# EAGLE board CAN-BUS-UART_v1 (EAGLE 6.3)
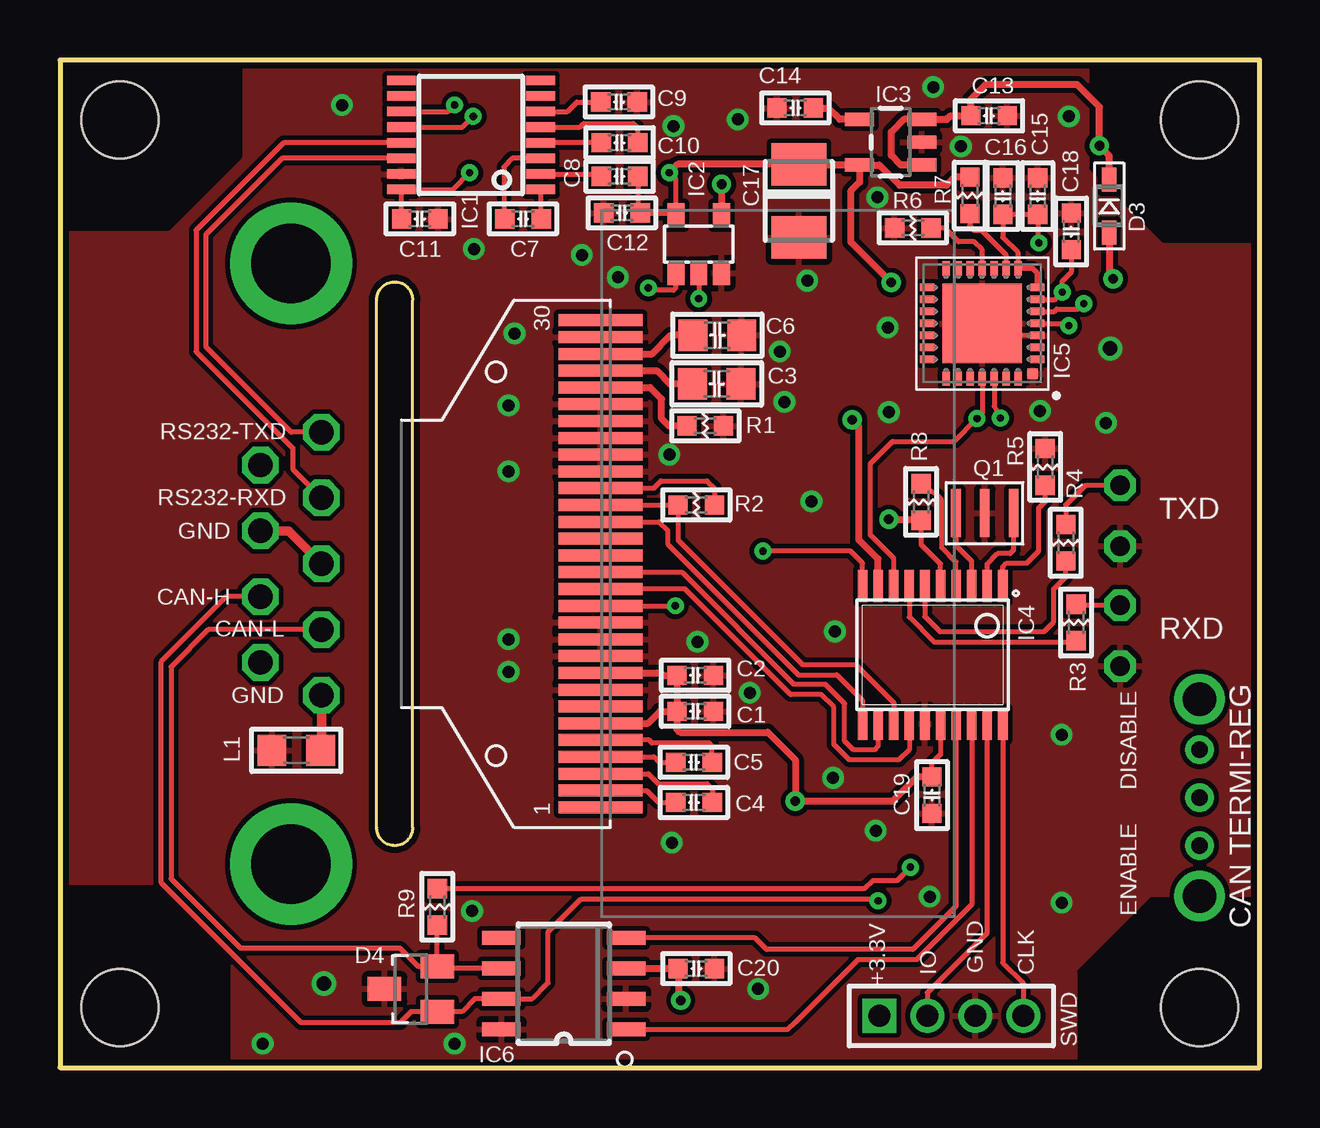
[diagram p0: board, top side]
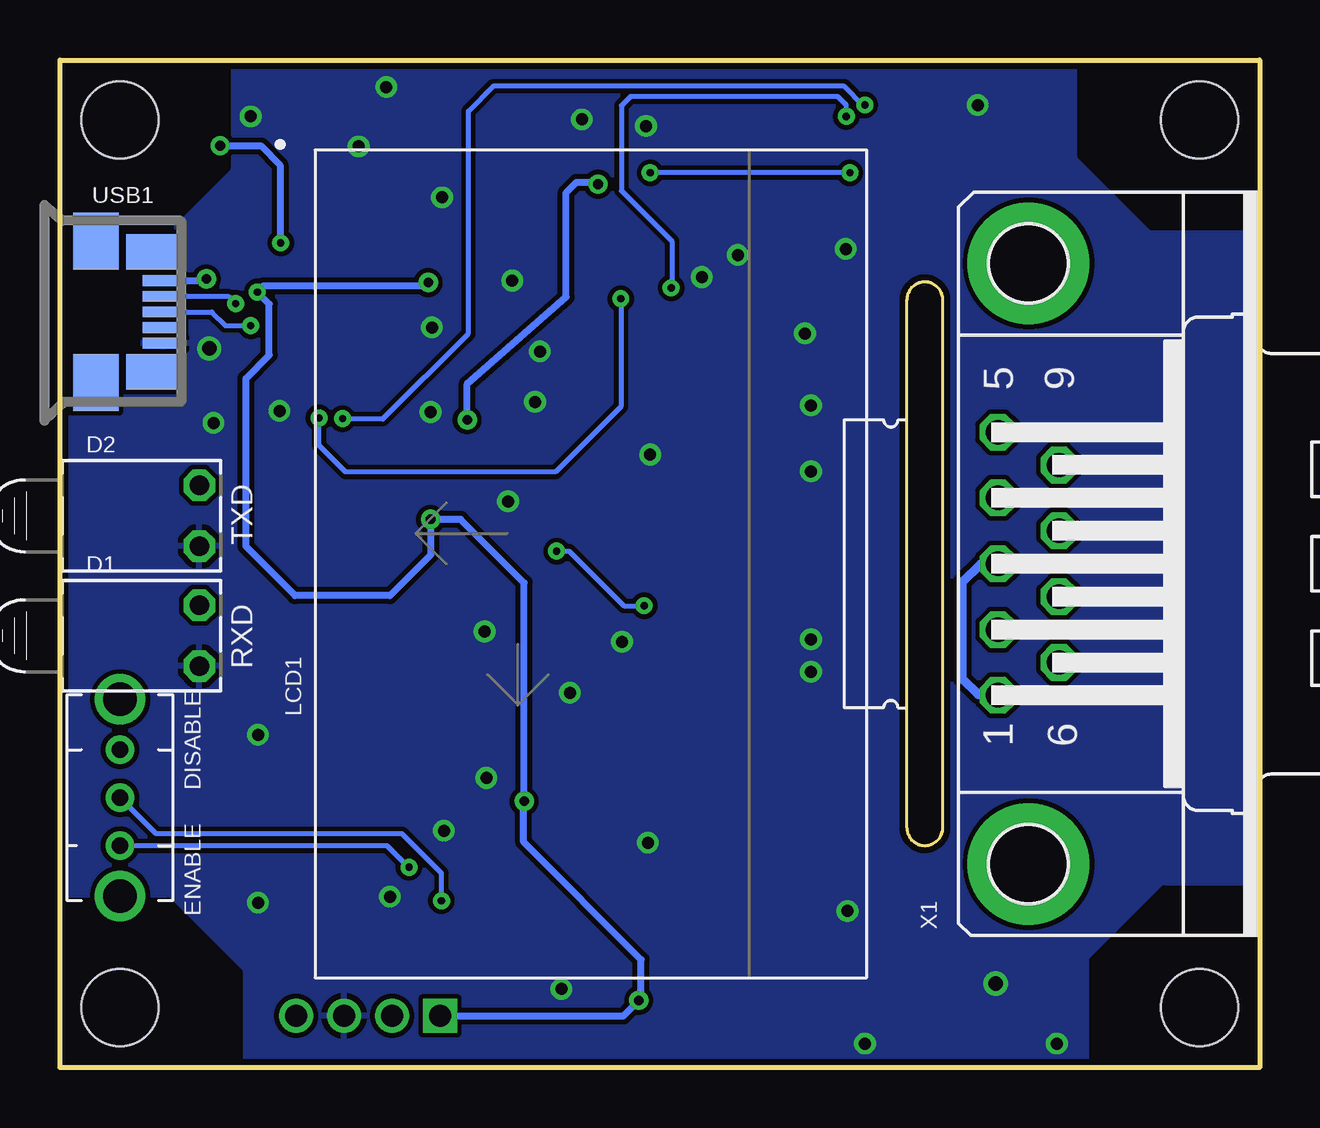
[diagram p1: board, bottom side, seen from below]

Size 50 x 42 mm. Coordinates in mm from the lower left corner, seen from the top.
Outline: 50,0 50,42 0,42 0,0 50,0
Copper layers (1+16): Top 0.035mm / dielectric 1.5mm / Bottom 0.035mm
Design rules "default": minimum track width 0.2mm, minimum drill 0.3mm, track to track 0.2mm, track to pad 0.2mm, pad to pad 0.2mm, via to via 0.2mm, smd to smd 0.2mm, copper to edge 10mil, drill to drill 0.2mm, minimum pad ring 10mil, minimum via ring 8mil, stop-mask expansion 4mil, vias tented up to drill 0mil, thermal gap 10mil
Net classes: 0 default: clearance 0.2 mm; 2 GND: width 0.2 mm, clearance 0.152 mm
Holes 3.2 mm at 47.5,39.5 2.5,2.5 47.5,2.5 2.5,39.5

## Footprints (pad centres in the part's own frame; a part is rotated, then mirrored left to right if it is on the bottom)
C0603 = smd 0.8 x 0.8: 1 -0.762,0; 2 0.762,0
C0805 = smd 1.2 x 1.3: 1 -1.016,0; 2 1.016,0
C3528-21/T = smd 1.778 x 2.286: + 1.524,0; - -1.524,0
3FG2HD-T1 = drill 0.8 octagon: A -0.889,1.27; K -0.889,-1.27
SOD323 = smd 1 x 0.6: A 1.1,0; C -1.1,0
SOT23 = smd 1 x 1.4: D 0,-1.1; G 0.95,1.1; S -0.95,1.1
PW_R-PDSO-G16 = smd 0.4 x 1.2: 1 -2.275,-2.9; 2 -1.625,-2.9; 3 -0.975,-2.9; 4 -0.325,-2.9; 5 0.325,-2.9; 6 0.975,-2.9; 7 1.625,-2.9; 8 2.275,-2.9; 9 2.275,2.9; 10 1.625,2.9; 11 0.975,2.9; 12 0.325,2.9; 13 -0.325,2.9; 14 -0.975,2.9; 15 -1.625,2.9; 16 -2.275,2.9
SOT23-5L_MC74HC1G08 = smd 0.7 x 1: 1 -0.95,-1.2; 2 0,-1.2; 3 0.95,-1.2; 4 0.95,1.2; 5 -0.95,1.2
SOT23-5 = smd 0.55 x 1.2: 1 -0.95,-1.3; 2 0,-1.3; 3 0.95,-1.3; 4 0.95,1.3; 5 -0.95,1.3
TSSOP20 = smd 0.4 x 1.35: 1 -2.925,-2.875; 2 -2.275,-2.875; 3 -1.625,-2.875; 4 -0.975,-2.875; 5 -0.325,-2.875; 6 0.325,-2.875; 7 0.975,-2.875; 8 1.625,-2.875; 9 2.275,-2.875; 10 2.925,-2.875; 11 2.925,2.875; 12 2.275,2.875; 13 1.625,2.875; 14 0.975,2.875; 15 0.325,2.875; 16 -0.325,2.875; 17 -0.975,2.875; 18 -1.625,2.875; 19 -2.275,2.875; 20 -2.925,2.875
MLP28 = smd 0.6 x 0.3: 1 -2.3,1.5; 2 -2.3,1; 3 -2.3,0.5; 4 -2.3,0; 5 -2.3,-0.5; 6 -2.3,-1; 7 -2.3,-1.5; 15 2.3,-1.5; 16 2.3,-1; 17 2.3,-0.5; 18 2.3,0; 19 2.3,0.5; 20 2.3,1; 21 2.3,1.5 | smd 0.3 x 0.6: 8 -1.5,-2.3; 9 -1,-2.3; 10 -0.5,-2.3; 11 0,-2.3; 12 0.5,-2.3; 13 1,-2.3; 14 1.5,-2.3; 22 1.5,2.3; 23 1,2.3; 24 0.5,2.3; 25 0,2.3; 26 -0.5,2.3; 27 -1,2.3; 28 -1.5,2.3 | smd 3.3 x 3.3: EXP 0,0 | smd 0.435 x 0.435: M -2.103,2.103
SO8 = smd 0.6 x 1.6: 1 -1.905,-2.6; 2 -0.635,-2.6; 3 0.635,-2.6; 4 1.905,-2.6; 5 1.905,2.6; 6 0.635,2.6; 7 -0.635,2.6; 8 -1.905,2.6
1X04M = drill 0.914 square: 1 -3,0 | drill 0.914: 2 -1,0; 3 1,0; 4 3,0
L0805 = smd 1.2 x 1.3: 1 -1.016,0; 2 1.016,0
SH1106_1.3OLED_BUTTOM = smd 0.5 x 3.5: 1 10.15,-5.97; 2 9.45,-5.97; 3 8.75,-5.97; 4 8.05,-5.97; 5 7.35,-5.97; 6 6.65,-5.97; 7 5.95,-5.97; 8 5.25,-5.97; 9 4.55,-5.97; 10 3.85,-5.97; 11 3.15,-5.97; 12 2.45,-5.97; 13 1.75,-5.97; 14 1.05,-5.97; 15 0.35,-5.97; 16 -0.35,-5.97; 17 -1.05,-5.97; 18 -1.75,-5.97; 19 -2.45,-5.97; 20 -3.15,-5.97; 21 -3.85,-5.97; 22 -4.55,-5.97; 23 -5.25,-5.97; 24 -5.95,-5.97; 25 -6.65,-5.97; 26 -7.35,-5.97; 27 -8.05,-5.97; 28 -8.75,-5.97; 29 -9.45,-5.97; 30 -10.15,-5.97
CSTLA_X = smd 0.4 x 2: 1 -1.19,-0.02; 2 0.01,-0.02; 3 1.21,-0.02
R0603@1 = smd 0.8 x 0.8: 1 -0.762,0; 2 0.762,0
R0603 = smd 0.8 x 0.8: 1 -0.762,0; 2 0.762,0
SK-12DO2 = drill 0.7: 1 -2,0; 3 2,0; C 0,0 | drill 1.4: P$4 -4.1,0; P$5 4.1,0
MOLEX-47364-0001 = smd 1.7 x 0.45: 1 2.8,1.3; 2 2.8,0.65; 3 2.8,0; 4 2.8,-0.65; 5 2.8,-1.3 | smd 1.9 x 2.375: GND1 0,2.95; GND4 0,-2.95 | smd 2.1 x 1.475: GND2 2.3,2.5; GND3 2.3,-2.5
M09H-1 = drill 1.016 octagon: 1 -5.486,0; 2 -2.743,0; 3 0,0; 4 2.743,0; 5 5.486,0; 6 -4.115,-2.54; 7 -1.372,-2.54; 8 1.372,-2.54; 9 4.115,-2.54 | drill 3.302 pad 5.08: G1 -12.522,-1.27; G2 12.522,-1.27

## Placement (x,y rotation side)
C1  1uF  [C0603]  26.48,14.85 0 top
C2  1uF  [C0603]  26.48,16.35 0 top
C3  6.8uF  [C0805]  27.38,28.5 0 top
C4  1uF  [C0603]  26.43,11.05 180 top
C5  1uF  [C0603]  26.43,12.72 180 top
C6  2.2uF  [C0805]  27.4,30.52 0 top
C7  0.1uF  [C0603]  19.3,35.38 0 top
C8  0.1uF  [C0603]  23.32,37.15 180 top
C9  0.1uF  [C0603]  23.3,40.25 180 top
C10  0.1uF  [C0603]  23.32,38.55 180 top
C11  0.1uF  [C0603]  15,35.38 180 top
C12  0.1uF  [C0603]  23.43,35.62 0 top
C13  1uF/10V  [C0603]  38.73,39.67 180 top
C14  470pF  [C0603]  30.65,40 0 top
C15  0.1uF  [C0603]  40.75,36.33 90 top
C16  1uF  [C0603]  39.3,36.33 90 top
C17  47uF/6V  [C3528-21/T]  30.8,36.12 90 top
C18  1uF  [C0603]  42.15,34.85 270 top
C19  0.1uF  [C0603]  36.34,11.36 90 top
C20  0.1uF  [C0603]  26.52,4.12 180 top
D1  STATUS  [3FG2HD-T1]  43.3,18 0 bottom
D2  STATUS  [3FG2HD-T1]  43.3,23 0 bottom
D3  B5189W  [SOD323]  43.73,35.91 270 top
D4  NPU2105  [SOT23]  14.62,3.27 270 top
IC1  MAX3232CPW  [PW_R-PDSO-G16]  17.12,38.88 90 top
IC2  MC74HC1G08  [SOT23-5L_MC74HC1G08]  26.62,34.33 0 top
IC3  MIC5219-3.3V  [SOT23-5]  34.62,38.58 90 top
IC4  STM32F042X  [TSSOP20]  36.38,17.2 180 top
IC5  CP2102  [MLP28]  38.44,31.02 180 top
IC6  SN65HVD230  [SO8]  21,3.5 90 top
JP1  SWD  [1X04M]  37.16,2.16 0 top
L1  BEAD  [L0805]  9.85,13.22 180 top
LCD1  SH1106 1.3Inch OLED  [SH1106_1.3OLED_BUTTOM]  28.5,21 270 top
Q1  8MHz  [CSTLA_X]  38.55,23.09 180 top
R1  100k  [R0603@1]  26.9,26.75 180 top
R2  0  [R0603@1]  26.52,23.45 0 top
R3  220  [R0603]  42.35,18.55 270 top
R4  220  [R0603]  41.92,21.88 270 top
R5  10k  [R0603@1]  41.06,25.04 90 top
R6  10k  [R0603]  35.55,35 0 top
R7  10k  [R0603]  37.92,36.35 90 top
R8  10k  [R0603@1]  35.9,23.57 270 top
R9  120  [R0603@1]  15.73,6.7 90 top
SW1  SK-12D02  [SK-12DO2]  47.5,11.25 270 bottom
USB1  MOLEX-47346-0001  [MOLEX-47364-0001]  48.5,31.5 0 bottom
X1  CAN-DSUB  [M09H-1]  10.9,21 90 bottom

## Library data of the parts
C1-C16 C18-C20 D1-D4 IC1 IC2 IC6 L1 Q1 R1-R9 SW1 = cona_lib
C17 = rc-master-smd
IC3 = SparkFun
IC4 = stm32
IC5 = silabs; MF: FARNELL; MPN: CP2102-GM; OC_FARNELL: 9282130; OC_NEWARK: 30K5635
JP1 = pinhead
LCD1 = OLED_Display
USB1 = usb_con-update
X1 = con-subd

## Nets
3V3: C1.1 C2.1 C8.1 C11.2 C12.2 C17.+ C18.2 C19.2 C20.2 IC1.16 IC2.5 IC3.5 IC4.5 IC4.16 IC5.6 IC6.3 JP1.1 LCD1.6 LCD1.9 R7.2 R8.2
+5V: C13.2 C15.1 C16.1 D3.C IC3.1 IC3.3 IC5.7 IC5.8
BOOT0: IC4.1 R5.1
CAN_RX: IC4.17 IC6.4
CAN_TX: IC4.18 IC6.1
CANH: D4.G IC6.7 SW1.C X1.7
CANL: D4.S IC6.6 R9.1 X1.2
GND: C1.2 C2.2 C3.2 C6.2 C9.1 C11.1 C12.1 C13.1 C14.1 C15.2 C16.2 C17.- C18.1 C19.1 C20.1 D1.K D2.K D4.D IC1.15 IC2.3 IC3.2 IC4.15 IC5.3 IC5.EXP IC5.M IC6.2 IC6.8 JP1.3 L1.2 LCD1.8 LCD1.10 LCD1.11 LCD1.12 LCD1.21 LCD1.22 LCD1.23 LCD1.24 LCD1.25 LCD1.29 Q1.2 R1.1 R5.2 R6.1 USB1.5
LCD_D/C: IC4.12 LCD1.15
LCD_RST: IC4.14 LCD1.14
LED0: IC4.7 R3.2
LED1: IC4.6 R4.2
N$1: IC5.9 R7.1
N$2: IC4.2 Q1.1
N$3: IC4.3 Q1.3
N$4: D3.A USB1.1
N$5: R9.2 SW1.3
N$6: LCD1.26 R1.2
N$7: D1.A R3.1
N$8: IC5.5 USB1.2
N$9 [GND]: L1.1 X1.1 X1.3 X1.8
N$10: C14.2 IC3.4
N$14: C10.1 IC1.5
N$15: C4.2 LCD1.2
N$16: C4.1 LCD1.3
N$17: C5.2 LCD1.4
N$18: C5.1 LCD1.5
N$19: LCD1.20 R2.2
N$20: IC5.4 USB1.3
N$21: C3.1 LCD1.27
N$22: C6.1 LCD1.28
N$23: IC5.11 R6.2
N$25: C10.2 IC1.4
N$26: C9.2 IC1.6
N$27: C7.2 IC1.1
N$29: C7.1 IC1.3
N$31: C8.2 IC1.2
N$39: D2.A R4.1
NRST: IC4.4 R8.1
RXD: IC1.13 X1.4
RXI2: IC2.4 IC4.9
RXI2_A: IC2.2 IC5.26
RXI2_B: IC1.12 IC2.1
SPI1_MOSI: IC4.13 LCD1.19 R2.1
SPI1_NSS: IC4.10 LCD1.13
SPI1_SCK: IC4.11 LCD1.18
SWCLK: IC4.20 JP1.4
SWDIO: IC4.19 JP1.2
TXD: IC1.14 X1.5
TXO2: IC1.11 IC4.8 IC5.25

## Tracks (layer width: path | path; a pad name or v marks a point on that pad's centre or on a via)
3V3  (via drill 0.3, 0.4)
  Top 0.2: C18.2 42.15,33.15 41.77,32.77 v41.77,32.33 41.47,32.02 IC5.6 | C8.1 24.09,35.73 C12.2 25.57,35.62 IC2.5 25.65,35.55 25.65,37.08 25.43,37.3 v25.4,37.3 | C11.2 14.24,36.59 IC1.16 16.38,36.6 v17.07,37.3 | IC4.5 36.7,21 35.9,21.8 R8.2 | IC4.16 36.7,13.05 36.34,12.7 C19.2
  Top 0.3: IC6.3 25.75,4.14 C20.2 25.77,4.11 25.77,2.9 v25.88,2.8 | LCD1.6 24.5,14.35 25,14.85 C1.1 | LCD1.9 25.05,16.45 25.15,16.35 C2.1 C1.1 | C1.1 25.71,14.11 25.85,13.97 29.5,13.97 30.65,12.82 v30.65,11.1 34.7,11.1 35.72,12.12 C19.2 | IC3.5 30.82,37.62 C17.+ 25.75,37.65 v25.4,37.3 | IC3.5 34.15,37.62 35,36.77 36.95,36.77 37.29,37.11 R7.2 | v34.55,22.85 35.86,22.85 R8.2 | IC3.5 33.33,36.9 32.95,36.52 32.95,34.42 v34.65,32.73
  Bottom 0.2: v17.07,37.3 v25.4,37.3
  Bottom 0.3: JP1.1 26.52,2.16 v25.88,2.8 25.77,2.9 25.77,4.5 30.68,9.4 30.68,11.07 v30.65,11.1 30.65,20.2 33.3,22.85 v34.55,22.85 34.55,21.38 36.25,19.68 40.2,19.68 42.25,21.73 42.25,28.73 41.27,29.7 41.27,31.82 v41.77,32.33 41.52,32.58 34.8,32.58 v34.65,32.73
+5V  (via drill 0.3, 0.4)
  Top 0.2: v40.8,34.38 40.75,34.42 C15.1 C16.1 39.3,34.6 39.94,33.96 IC5.8 40.53,33.32 40.74,33.11 IC5.7
  Top 0.3: D3.C 43.73,38.02 v43.33,38.42 43.33,40.05 42.4,40.98 38.58,40.98 37.95,40.35 C13.2 37.12,39.67 36.98,39.52 IC3.3 35.17,39.52 34.65,39 34.65,38.02 35.05,37.62 IC3.1
  Bottom 0.2: 40.9,34.27 v40.8,34.38
  Bottom 0.3: v43.33,38.42 41.62,38.42 40.83,37.62 40.83,34.4 v40.8,34.38
BOOT0
  Top 0.2: IC4.1 39.3,20.88 39.45,21.02 40.3,21.02 40.8,21.52 40.8,23.32 41.08,23.6 41.08,24.26 R5.1
CAN_RX
  Top 0.2: IC6.4 28.98,5.4 29.45,4.93 35.55,4.93 37.35,6.72 IC4.17
CAN_TX
  Top 0.2: IC4.18 38,6.8 35.7,4.5 33.25,4.5 30.62,1.88 30.35,1.6 30.34,1.59 IC6.1
CANH  (via drill 0.3)
  Top 0.2: X1.7 6.93,19.63 4.2,16.9 4.2,7.72 10.05,1.88 14.18,1.88 14.62,2.32 D4.G 16.75,2.32 17.29,2.86 IC6.7 19.69,2.86 20.35,3.52 20.35,5.65 21.73,7.03 34.02,7.03 v34.1,6.95
  Bottom 0.2: v34.1,6.95 34.1,8.1 35.75,9.75 46,9.75 SW1.C
CANL
  Top 0.2: IC6.6 15.82,4.14 D4.S | D4.S R9.1 | X1.2 6.18,18.26 4.62,16.7 4.62,7.88 7.52,4.98 14.18,4.98 14.93,4.23 D4.S
GND  (via drill 0.5, 0.6)
  Top 0.2: IC5.3 39.02,30.55 IC5.EXP
  other vias: 25.57,39.25 42.05,39.65 37.55,38.4 43.77,29.98 11,3.5 31.15,32.8 30,29.85 30.2,27.75 31.32,23.6 28.75,15.62 26.57,17.75 32.3,18.18 32.23,12.07 18.7,17.85 18.7,16.5 18.7,24.85 18.7,27.6 18.95,30.6 25.4,25.55 17.25,34.12 21.75,33.88 41.75,13.88 36.25,7.12 16.45,1 17.18,6.53 23.25,32.95 34.08,36.27 34.5,30.85 34.55,27.32 40.85,27.38 43.6,26.88 34,9.88 25.5,9.38 29.1,3.27 41.75,6.88 11.75,40.12 8.45,1 36.4,40.88 28.25,39.52
  pour Top (rank 3): 0,0 0,42 50,42 50,0
  pour Bottom (rank 2): 0,0 0,42 50,42 50,0
LCD_D/C
  Top 0.2: LCD1.15 25.93,20.65 30.6,15.97 31.9,15.97 32.7,15.18 32.7,13.62 33.08,13.25 33.95,13.25 34.1,13.4 IC4.12
LCD_RST
  Top 0.2: IC4.14 35.4,13.25 34.98,12.82 32.9,12.82 32.25,13.47 32.25,15.03 31.73,15.55 30.45,15.55 26.05,19.95 LCD1.14
LED0
  Top 0.2: IC4.7 35.4,18.77 36.42,17.75 42.31,17.75 R3.2
LED1
  Top 0.2: IC4.6 36.05,18.8 36.67,18.18 41.02,18.18 41.42,18.57 41.42,19.95 41.92,20.45 R4.2
N$1
  Top 0.2: IC5.9 39.44,33.86 38.4,34.9 38.1,34.9 37.92,35.08 R7.1
N$2
  Top 0.2: IC4.2 38.65,21 39.08,21.43 39.6,21.43 39.74,21.57 Q1.1
N$3
  Top 0.2: IC4.3 38,21.1 37.34,21.75 Q1.3
N$4  (via drill 0.4)
  Top 0.3: D3.A 43.73,33.04 v43.9,32.88
  Bottom 0.3: USB1.1 43.98,32.8 v43.9,32.88
N$5  (via drill 0.3)
  Top 0.2: R9.2 33.54,7.46 33.88,7.8 34.9,7.8 v35.45,8.35
  Bottom 0.2: v35.45,8.35 35.48,8.35 36.38,9.25 SW1.3
N$6
  Top 0.3: LCD1.26 24.6,28.35 25.07,27.88 25.07,27.05 25.38,26.75 R1.2
N$7
  Top 0.2: D1.A 42.39,19.27 R3.1
N$8  (via drill 0.3)
  Top 0.2: IC5.5 41.45,31.52 41.55,31.62 42.45,31.62 v42.67,31.85
  Bottom 0.2: USB1.2 42.98,32.15 v42.67,31.85
N$9
  Top 0.4: X1.1 10.9,13.26 L1.1 | X1.8 9.53,22.37 X1.3
  Bottom 0.4: X1.3 11.62,21 12.4,20.23 12.4,16.23 11.73,15.55 10.94,15.55 X1.1
N$10
  Top 0.3: IC3.4 32.5,39.52 32.05,39.98 31.44,39.98 C14.2
N$11
  cutout Bottom (no thermals): 50,7 45.5,7 42.5,4 42.5,0 50,0
  cutout Top (no thermals): 50,7 45.5,7 42.5,4 42.5,0 50,0
  cutout Top (no thermals): 7,0 7,4.5 4,7.5 0,7.5 0,0
  cutout Bottom (no thermals): 7,0 7,4.5 4,7.5 0,7.5 0,0
  cutout Top (no thermals): 43,42 43,37.5 46,34.5 50,34.5 50,42
  cutout Bottom (no thermals): 43,42 43,37.5 46,34.5 50,34.5 50,42
  cutout Bottom (no thermals): 0,35 4.5,35 7.5,38 7.5,42 0,42
  cutout Top (no thermals): 0,35 4.5,35 7.5,38 7.5,42 0,42
N$14
  Top 0.2: IC1.5 21.68,39.2 21.82,39.35 23.9,39.35 24.07,39.17 24.07,38.56 C10.1
N$15
  Top 0.2: LCD1.2 24.45,11.55 24.95,11.05 C4.2
N$16
  Top 0.2: C4.1 27.2,11.06 27.2,11.6 26.98,11.82 24.95,11.82 24.52,12.25 LCD1.3
N$17
  Top 0.2: C5.2 24.98,12.72 24.75,12.95 LCD1.4
N$18
  Top 0.2: C5.1 27.19,13.41 27.07,13.53 24.68,13.53 24.55,13.65 LCD1.5
N$19
  Top 0.2: LCD1.20 24.75,24.15 25.05,24.45 26.98,24.45 27.27,24.15 27.27,23.46 R2.2
N$20  (via drill 0.3)
  Top 0.2: IC5.4 41.95,31.02 v42.05,30.93
  Bottom 0.2: USB1.3 43.67,31.5 43.1,30.93 v42.05,30.93
N$21
  Top 0.3: LCD1.27 24.88,29.05 25.43,28.5 C3.1
N$22
  Top 0.3: LCD1.28 24.68,29.75 25.45,30.52 C6.1
N$23
  Top 0.2: IC5.11 38.44,34.09 38.1,34.42 37.45,34.42 36.88,35 R6.2
N$25
  Top 0.2: C10.2 IC1.4
N$26
  Top 0.2: IC1.6 21.15,39.85 21.55,40.25 C9.2
N$27
  Top 0.2: C7.2 20.06,36.56 IC1.1
N$29
  Top 0.2: IC1.3 18.85,37.9 18.5,37.55 18.5,35.41 C7.1
N$31
  Top 0.2: IC1.2 22.46,37.25 C8.2
N$39
  Top 0.2: D2.A 42.74,24.27 41.92,23.45 R4.1
NRST
  Top 0.2: IC4.4 37.35,21.07 36.75,21.68 36.75,23.65 36.56,23.84 R8.1
RXD
  Top 0.2: IC1.13 9.32,38.55 5.68,34.9 5.68,29.85 9.7,25.82 9.7,24.94 X1.4
RXI2  (via drill 0.4)
  Top 0.3: v27.57,36.83 IC2.4 | v33.02,27 33.3,26.73 33.3,22 34.1,21.2 IC4.9
  Bottom 0.3: v33.02,27 33.02,28.5 28.9,32.12 28.9,36.48 28.48,36.9 27.65,36.9 v27.57,36.83
RXI2_A  (via drill 0.3)
  Top 0.2: IC5.26 38.94,27.57 v39.2,27.07 | IC2.2 v26.62,32.05
  Bottom 0.2: v26.62,32.05 26.62,27.55 29.35,24.82 38.1,24.82 39.2,25.93 v39.2,27.07
RXI2_B  (via drill 0.3)
  Top 0.2: IC1.12 16.77,39.2 v17.23,39.65 | IC2.1 25.65,33.1 25.65,32.48 25.57,32.4 24.62,32.4 v24.52,32.5
  Bottom 0.2: v17.23,39.65 17.23,40.12 17.57,40.48 26.23,40.48 26.6,40.1 26.6,36.55 24.5,34.45 24.5,32.52 v24.52,32.5
SPI1_MOSI
  Top 0.2: LCD1.19 R2.1 25.76,21.99 30.95,16.8 33.15,16.8 34.75,15.2 IC4.13
SPI1_NSS  (via drill 0.3)
  Top 0.2: LCD1.13 v25.65,19.25 | IC4.10 33.45,21.02 32.95,21.52 v29.3,21.52
  Bottom 0.2: 25.77,19.25 v25.65,19.25 26.5,19.25 28.77,21.52 v29.3,21.52
SPI1_SCK
  Top 0.2: LCD1.18 24.98,22.75 25.32,22.4 25.32,21.82 30.77,16.38 32.38,16.38 33.45,15.3 IC4.11
SWCLK
  Top 0.2: IC4.20 39.3,4.38 40.15,3.52 JP1.4
SWDIO
  Top 0.2: IC4.19 38.65,5.62 36.15,3.12 JP1.2
TXD
  Top 0.2: IC1.14 9.25,37.9 6.07,34.73 6.07,30.05 9.64,26.49 X1.5
TXO2  (via drill 0.3)
  Top 0.2: IC1.11 16.18,39.85 v16.45,40.12 | IC5.25 38.44,27.27 v38.23,27.05 37.27,26.1 34.7,26.1 33.77,25.18 33.77,22.2 34.75,21.23 IC4.8
  Bottom 0.2: v16.45,40.12 16.52,40.12 17.3,40.9 31.95,40.9 32.98,39.88 32.98,30.6 36.55,27.02 38.2,27.02 v38.23,27.05

## Text on the board
_tsilk: RS232-TXD | RS232-RXD | GND | TXD | CAN-H | CAN-L | RXD | GND | DISABLE | ENABLE | CAN TERMI-REG | IO | GND | CLK | +3.3V | SWD
_bsilk: TXD | RXD | DISABLE | ENABLE